# EAGLE board motor12v (EAGLE 7.1.0)
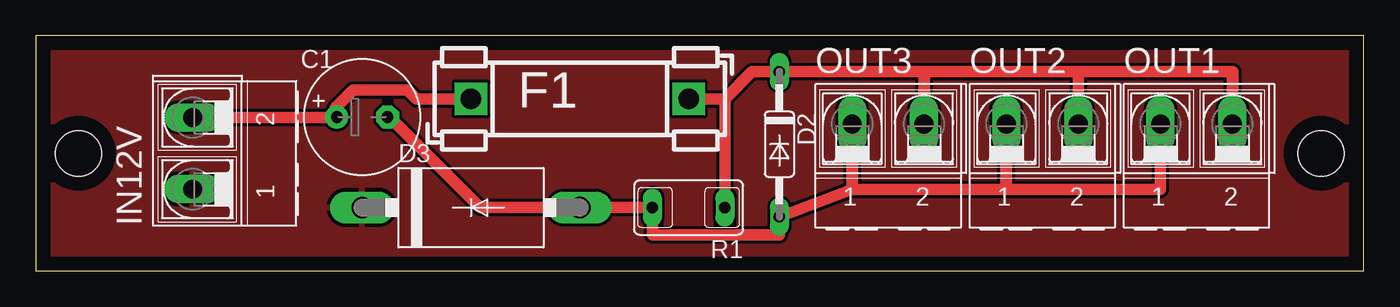
[diagram p0: board, top side]

Size 93 x 16.5 mm. Coordinates in mm from the lower left corner, seen from the top.
Outline: 0,0 93,0 93,16.5 0,16.5 0,0
Copper layers (1*16): Top 0.035mm / dielectric 1.5mm / Bottom 0.035mm
Design rules "default": minimum track width 10mil, minimum drill 24mil, track to track 8mil, track to pad 8mil, pad to pad 8mil, via to via 8mil, smd to smd 8mil, copper to edge 40mil, drill to drill 8mil, minimum pad ring 10mil, minimum via ring 8mil, stop-mask expansion 4mil, vias tented up to drill 0mil, thermal gap 10mil
Holes 3.2 mm at 90,8.25 3,8.25

## Footprints (pad centres in the part's own frame; a part is rotated, then mirrored left to right if it is on the bottom)
E3,5-8 = drill 0.813 pad 1.6: + -1.778,0 | drill 0.813 pad 1.6 octagon: - 1.778,0
DO35-10 = drill 0.813 long: A 5.08,0; C -5.08,0
DO201-15 = drill 1.499 long: A 7.62,0; C -7.62,0
FUSE_HOLDER_5X20MM = drill 1.422 pad 2.286 square: 1 0,0; 2 15.24,0
AK500/2-H = drill 1.321 long: 1 -2.515,0; 2 2.515,0
S2220 = drill 0.813 long: 1 -2.54,0; 2 2.54,0

## Placement (x,y rotation side)
C1  [E3,5-8]  22.86,10.79 0 top
D2  1N4148DO35-10  [DO35-10]  52.07,8.89 270 top
D3  1N5400  [DO201-15]  30.48,4.45 0 top
F1  FUSEBLANK_5X20MM  [FUSE_HOLDER_5X20MM]  30.48,12.06 0 top
IN12V  [AK500/2-H]  11,8.25 90 top
OUT1  [AK500/2-H]  81.28,10.29 0 top
OUT2  [AK500/2-H]  70.48,10.29 0 top
OUT3  [AK500/2-H]  59.69,10.29 0 top
R1  S2220  [S2220]  45.72,4.45 180 top

## Library data of the parts
C1 = resistor
D2 D3 = diode
F1 = fuse; OC_FARNELL: unknown; OC_NEWARK: unknown
IN12V OUT1-OUT3 = con-ptr500; OC_FARNELL: unknown; OC_NEWARK: unknown
R1 = varistor

## Nets
+12V: C1.+ F1.1 IN12V.2
GND: D3.C IN12V.1
OUT_+12V: D2.C F1.2 OUT1.2 OUT2.2 OUT3.2 R1.1
OUT_GND: C1.- D2.A D3.A OUT1.1 OUT2.1 OUT3.1 R1.2

## Tracks (layer width: path | path; a pad name or v marks a point on that pad's centre or on a via)
+12V
  Top 0.813: 21.08,10.77 C1.+ | F1.1 26.67,12.06 26.04,12.7 22.23,12.7 20.95,11.43 20.95,10.92 C1.+ | IN12V.2 21.05,10.77 C1.+
GND
  pour Top: -6.35,-19.05 -6.35,91.44 145.41,91.44 145.41,-19.05
OUT_+12V
  Top 0.813: F1.2 48.26,12.06 | 48.26,12.06 50.16,13.97 D2.C 62.2,13.97 OUT3.2 62.23,11.43 62.23,13.97 73,13.97 OUT2.2 73.03,11.43 73.03,13.97 83.8,13.97 OUT1.2 83.82,11.43 83.82,13.97 | R1.1 48.26,12.06
OUT_GND
  Top 0.813: C1.- 24.77,10.79 31.11,4.45 D3.A R1.2 43.18,2.54 52.07,2.54 D2.A 57.15,5.71 | 57.15,5.71 57.17,5.71 | 57.17,5.71 OUT3.1 57.15,11.43 57.15,5.71 | 57.17,5.71 67.94,5.71 | 67.94,5.71 67.97,5.71 | 67.97,5.71 OUT2.1 67.94,11.43 67.94,5.71 | 67.97,5.71 78.77,5.71 OUT1.1